# Altium PCB RS232转485通讯模块.PCBDOC
Units mm, origin at the board's own origin, x right, y up, seen from the top; angles counter-clockwise.
Board outline 172.85 x 123.82 mm, 2 copper layers (Top Layer, Bottom Layer); 18 components, 20 nets, 68 pads, 6 vias.
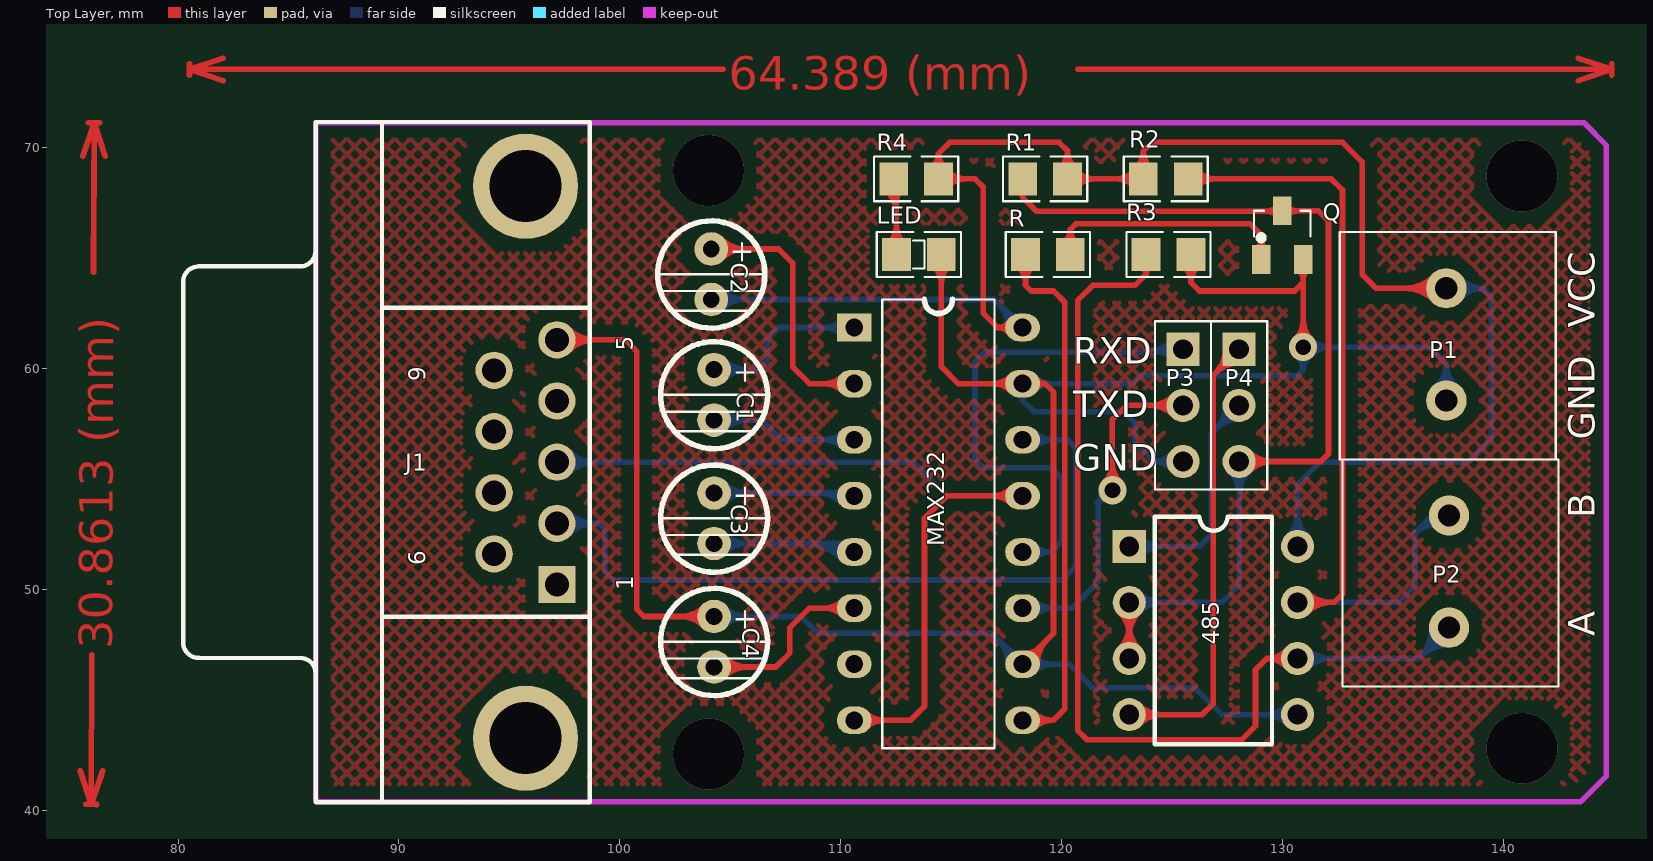
[diagram p0: Top Layer view]
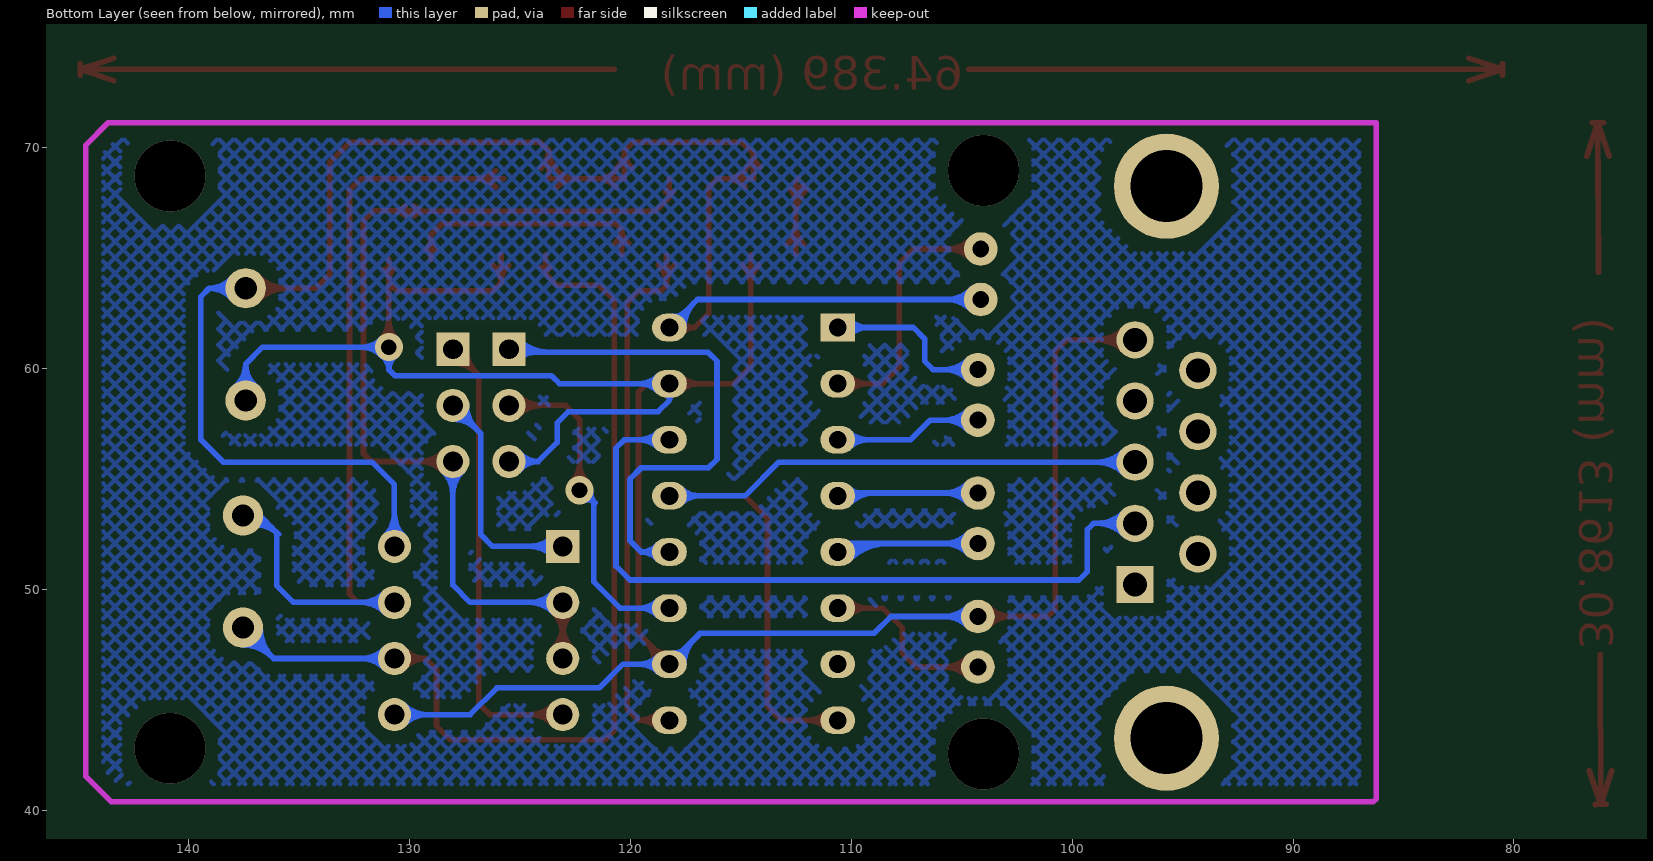
[diagram p1: Bottom Layer view, seen from below]

## Layer stack, top to bottom
Top Layer: signal copper 0.0356
Dielectric: dielectric 0.32, FR-4, Dk 4.8
Bottom Layer: signal copper 0.0356

## Board outline
36.322,110.363 36.322,3.937 208.534,3.937 208.534,127.762 36.068,127.762 36.068,108.966 35.687,108.966

## Design rules (kind name [scope] priority, off if disabled: settings)
Clearance [All] p1: gap=0.554
ComponentClearance [All] p1: gap=0.254 collisioncheckmode=0
PolygonConnect [All] p1: connectstyle=Relief reliefconductorwidth=0.254 reliefentries=4 polygonreliefangle="90 Angle"
RoutingVias [All] p1: holewidth=0.711 width=1.27 viastyle="Through Hole" minholewidth=0.711 minwidth=1.27 maxholewidth=0.711 maxwidth=1.27
SolderMaskExpansion [All] p1: expansion=0.102
TestPointUsage [All] p1: valid=0 allowmultiple=FALSE
Testpoint [All] p1: side=15 testpointundercomponent=TRUE minsize=1.016 maxsize=2.54 preferedsize=1.524 minholesize=0 maxholesize=1.016 preferedholesize=0.813 testpointgrid=0.025 style=1023 order=1234567890
Width [All] p1: maxlimit=0.254 minlimit=0.254 preferedwidth=0.254
17 further rules are at their usual default settings.

## Components (designator, comment, footprint, x,y, rotation, side; value= is the part's Value field where it differs from the comment)
485 "" DIP-8 126.873,48.133 r270 top
C1 "" C-DJ-4 101.727,57.531 r270 top
C2 "" C-DJ-4 101.6,62.992 r270 top
C3 "" C-DJ-4 101.727,51.943 r270 top
C4 "" C-DJ-4 101.727,46.355 r270 top
J1 "" DSUB1.385-2H9 86.233,55.753 r90 top
LED "" TP-0805-D 116.078,63.881 r0 top
MAX232 "" DIP16 110.617,61.849 r0 top
P1 "" JK128_2 138.557,63.119 r0 top
P2 "" JK128_2 138.684,52.832 r0 top
P3 "" HDR-3 124.333,54.61 r270 top
P4 "" HDR-3 126.873,54.61 r270 top
Q "" SO-G3 130.937,65.913 r0 top
R "" TP-0805-R 121.92,63.881 r0 top
R1 "" TP-0805-R 121.793,67.31 r0 top
R2 "" TP-0805-R 127.254,67.31 r0 top
R3 "" TP-0805-R 127.381,63.881 r0 top
R4 "" TP-0805-R 115.951,67.31 r0 top

## Footprints (in the part's own frame and the unit in brackets; to place one, negate y for a bottom-side part, rotate by r counter-clockwise, add the part's x,y. Pads: shape width x height; smd on the part's side, far side on the other; paste and mask are expansions set on the pad)
C-DJ-4 [mil] "电容4mm"
  round 60 hole 30: 1(-95,100) 2(-5,100)
  silkscreen extent -145,5 46,196
DIP16 [mil] "直插16管脚"
  rect 62x49.21 hole 32: 1(-0.15,-0.04)
  oval 62x49.21 hole 32: 2(-0.15,-100.04) 3(-0.15,-200.04) 4(-0.15,-300.04) 5(-0.15,-400.04) 6(-0.15,-500.04) 7(-0.15,-600.04) 8(-0.15,-700.04) 9(299.85,-700.04) 10(299.85,-600.04) 11(299.85,-500.04) 12(299.85,-400.04) 13(299.85,-300.04) 14(299.85,-200.04) 15(299.85,-100.04) 16(299.85,-0.04)
  silkscreen extent 50,-750 250,50
DIP-8 [mm] "DIP; 8 Leads; Row Spacing 7.62 mm; Pitch 2.54 mm"
  rect 1.5x1.5 hole 0.9: 1(-3.81,-3.81)
  round 1.5 hole 0.9: 2(-1.27,-3.81) 3(1.27,-3.81) 4(3.81,-3.81) 5(3.81,3.81) 6(1.27,3.81) 7(-1.27,3.81) 8(-3.81,3.81)
  silkscreen extent -5.15,-2.65 5.15,2.65
DSUB1.385-2H9 [mm] "Connector; D Subminiature; 9 Position; Right Angle; Pitch 1.385 mm"
  rect 1.69x1.69 hole 1.09: 1(-5.54,-10.92)
  round 1.69 hole 1.09: 2(-2.77,-10.92) 3(0,-10.92) 4(2.77,-10.92) 5(5.54,-10.92) 6(-4.155,-8.08) 7(-1.385,-8.08) 8(1.385,-8.08) 9(4.155,-8.08)
  round 4.76 hole 3.26: 10(-12.495,-9.5) 11(12.495,-9.5)
  silkscreen extent -15.4,-12.4 15.4,6
HDR-3 [mm] "3排针"
  rect 1.5x1.5 hole 0.9: 1(-6.253,1.165)
  round 1.5 hole 0.9: 2(-3.713,1.165) 3(-1.173,1.165)
  silkscreen extent -7.52,-0.11 0.1,2.43
JK128_2 [mil] "接线端子"
  round 71.81 hole 39.37: 1(-45,20) 2(-45,-180)
  silkscreen extent -235,-285 150,120
SO-G3 [mm] "贴片三极管"
  rect 0.85x1.3 smd: 1(-1.9,-0.983) 2(0,-0.983) 3(-0.95,1.217)
  silkscreen extent -2.23,-0.12 0.32,1.22
TP-0805-D [mm] "贴片二极管"
  rect 1.3x1.5 smd: 1(-3.556,1.27) 2(-1.524,1.27)
  silkscreen extent -4.44,0.25 -0.64,2.29
TP-0805-R [mm] "贴片0805"
  rect 1.3x1.5 smd: 1(-3.556,1.27) 2(-1.524,1.27)
  silkscreen extent -4.44,0.25 -0.64,2.29

## Part data
485: library part 485оƬ
C1 C2 C3 C4: library part "CAPACITOR POL", "Capacitor"
J1: library part "D Connector 9", "Receptacle Assembly, 9 Position, Right Angle"
LED: library part LED, "发光二极管"
MAX232: library part MAX232
P1 P2: library part PZ_2, "排针——2"
P3 P4: library part PZ_3, "排针——3"
Q: library part TPSJG_NPN, "贴片三极管——NPN"
R R1 R2 R3 R4: library part Res, "电阻"

## Via types
v1: diameter 3.2, hole 3.2, Top Layer to Bottom Layer, 4 vias
v2: diameter 1.27, hole 0.711, Top Layer to Bottom Layer, 2 vias

## Nets (pads, with @x,y where several pads share a name; then routed paths per layer and width w, separated by ;. In a path a pad name is that pad's centre, name@x,y a point inside that pad or via, vN(x,y) a via of type N, cw(c..) or ccw(c..) an arc to the next point about the centre after c; other vN are vias at no path point)
A: 485.6 P2.2 R3.1 | length 57.4
  Top Layer w0.254: R3.1@123.621,64.569 cw(c123.491,64.262) 123.825,64.262 ; R3.1 123.825,64.262 ; R3.1@124.029,64.569 ccw(c124.159,64.262) 123.825,64.262 ; 485.6@130.219,46.447 ccw(c129.286,45.608) 129.286,46.863 ; 485.6@130.219,47.279 cw(c129.286,48.118) 129.286,46.863 ; 485.6@130.408,46.616 ccw(c129.856,46.12) 129.856,46.863 ccw(c129.856,47.606) 485.6@130.408,47.11 ; 485.6 129.286,46.863 ; 123.825,64.262 123.317,63.754 121.412,63.754 120.726,63.068 120.726,43.612 121.158,43.18 128.143,43.18 128.778,43.815 128.778,46.355 129.286,46.863
  Bottom Layer w0.254: 485.6 136.144,46.863 P2.2 ; 485.6@130.944,46.602 cw(c131.574,45.972) 131.574,46.863 cw(c131.574,47.754) 485.6@130.944,47.124 ; 485.6@131.124,46.422 cw(c132.187,45.359) 132.187,46.863 cw(c132.187,48.367) 485.6@131.124,47.304 ; P2.2@136.756,48.26 cw(c134.861,48.26) 136.201,46.92 cw(c137.541,45.58) P2.2@137.541,47.475 ; P2.2@137.01,48.26 cw(c135.728,48.26) 136.635,47.354 cw(c137.541,46.447) P2.2@137.541,47.729
B: 485.7 P2.1 R2.2 | length 51.1
  Top Layer w0.254: R2.2 132.207,68.58 132.715,68.072 132.715,49.784 132.334,49.403 485.7 ; R2.2@126.1,68.21 cw(c126.993,67.317) 126.993,68.58 cw(c126.993,69.843) R2.2@126.1,68.95 ; 485.7@130.944,49.142 cw(c131.574,48.512) 131.574,49.403 cw(c131.574,50.294) 485.7@130.944,49.664 ; 485.7@131.124,48.962 cw(c132.187,47.899) 132.187,49.403 cw(c132.187,50.907) 485.7@131.124,49.844
  Bottom Layer w0.254: 485.7 135.255,49.403 136.017,50.165 136.017,52.578 136.779,53.34 P2.1 ; 485.7@130.944,49.142 cw(c131.574,48.512) 131.574,49.403 cw(c131.574,50.294) 485.7@130.944,49.664 ; 485.7@131.124,48.962 cw(c132.187,47.899) 132.187,49.403 cw(c132.187,50.907) 485.7@131.124,49.844 ; 135.928,52.489 cw(c136.934,51.484) P2.1@137.376,52.835 ; 136.221,52.782 cw(c137.078,51.925) P2.1@137.455,53.077 ; 136.513,53.074 cw(c137.222,52.365) P2.1@137.534,53.318
DI: 485.4 P4.1 | length 28.1
  Top Layer w0.254: 485.4 126.365,44.323 126.873,44.831 126.873,59.698 P4.1 ; 485.4@123.324,44.062 cw(c123.954,43.432) 123.954,44.323 cw(c123.954,45.214) 485.4@123.324,44.584 ; 485.4@123.504,43.882 cw(c124.567,42.819) 124.567,44.323 cw(c124.567,45.827) 485.4@123.504,44.764 ; P4.1@127.415,60.863 cw(c125.911,60.863) 126.974,59.799 cw(c128.038,58.736) P4.1@128.038,60.24 ; P4.1@127.669,60.863 cw(c126.778,60.863) 127.408,60.233 cw(c128.038,59.603) P4.1@128.038,60.494
GND: 485.5 C4.1 J1.5 LED.2 MAX232.10 MAX232.15 P1.2 P3.3 Q.2 R3.2 | length 161.2
  Top Layer w0.254: J1.5 100.251,61.293 100.762,60.782 100.762,49.098 101.092,48.768 C4.1 ; J1.5@97.481,60.965 cw(c98.273,60.173) 98.273,61.293 cw(c98.273,62.413) J1.5@97.481,61.621 ; J1.5@97.661,60.785 cw(c98.886,59.56) 98.886,61.293 cw(c98.886,63.026) J1.5@97.661,61.801 ; C4.1@103.818,48.319 ccw(c102.734,47.235) 102.734,48.768 ccw(c102.734,50.301) C4.1@103.818,49.217 ; C4.1@103.998,48.499 ccw(c103.347,47.848) 103.347,48.768 ccw(c103.347,49.688) C4.1@103.998,49.037 ; LED.2@114.184,64.681 cw(c113.291,63.788) 114.554,63.788 cw(c115.817,63.788) LED.2@114.924,64.681 ; LED.2 114.554,60.071 115.317,59.308 MAX232.15 119.254,59.308 ; MAX232.15@117.719,58.956 ccw(c116.869,58.106) 116.869,59.308 ccw(c116.869,60.51) MAX232.15@117.719,59.66 ; MAX232.10 118.236,46.608 119.634,48.006 119.634,58.928 119.254,59.308 ; MAX232.10@118.396,47.106 ccw(c118.396,47.923) 118.973,47.345 ; MAX232.10@118.64,46.608 cw(c119.614,46.608) 118.925,47.297 ; MAX232.15@118.828,59.061 cw(c119.254,58.817) 119.254,59.308 ; MAX232.15@118.828,59.555 ccw(c119.254,59.799) 119.254,59.308 ; MAX232.10@118.894,46.608 cw(c120.481,46.608) 119.359,47.731 ; R3.2@125.508,64.661 cw(c124.81,63.881) 125.857,63.881 ; R3.2 125.857,63.881 ; R3.2@126.206,64.661 ccw(c126.904,63.881) 125.857,63.881 ; v2@130.578,61.319 ccw(c129.711,62.186) 130.937,62.186 ; Q.2@130.726,64.494 cw(c130.217,63.986) 130.937,63.986 cw(c131.656,63.986) Q.2@131.148,64.494 ; v2(130.937,60.96) 130.937,61.722 ; 130.937,62.187 ccw(c132.164,62.187) v2@131.296,61.319 ; Q.2 130.937,63.881 ; 125.857,63.881 126.238,63.5 130.556,63.5 130.937,63.881 ; 130.937,61.722 cw(c130.62,61.722) 130.742,61.429 ccw(c130.62,61.722) 130.937,61.722 ; 130.937,61.722 ccw(c131.254,61.722) 131.132,61.429 cw(c131.254,61.722) 130.937,61.722 ; 130.937,61.722 130.937,63.881
  Bottom Layer w0.254: C4.1 108.204,48.768 108.966,48.006 116.835,48.006 MAX232.10 ; C4.1@104.536,48.499 cw(c105.187,47.848) 105.187,48.768 cw(c105.187,49.688) C4.1@104.536,49.037 ; C4.1@104.716,48.319 cw(c105.8,47.235) 105.8,48.768 cw(c105.8,50.301) C4.1@104.716,49.217 ; 117.106,47.735 cw(c115.978,46.608) MAX232.10@117.573,46.608 ; 117.498,47.343 ccw(c118.071,47.916) MAX232.10@118.071,47.106 ; 117.539,47.302 cw(c116.846,46.608) MAX232.10@117.827,46.608 ; MAX232.15@118.036,58.851 cw(c117.907,58.551) 118.233,58.551 ; MAX232.10@118.233,46.486 MAX232.10 ; MAX232.15@118.43,58.851 ccw(c118.56,58.551) 118.233,58.551 ; MAX232.10@118.748,46.256 cw(c119.598,45.406) 119.598,46.608 cw(c119.598,47.81) MAX232.10@118.748,46.96 ; MAX232.15@118.748,58.956 cw(c119.598,58.106) 119.598,59.308 cw(c119.598,60.51) MAX232.15@118.748,59.66 ; P3.3@125.018,55.386 ccw(c124.176,54.692) 124.176,55.783 ; P3.3@125.018,56.18 cw(c124.176,56.874) 124.176,55.783 ; P3.3@125.213,55.548 ccw(c124.715,55.137) 124.715,55.783 ccw(c124.715,56.429) P3.3@125.213,56.018 ; P3.3 124.176,55.783 ; 485.5@130.242,43.882 ccw(c129.179,42.819) 129.179,44.323 ccw(c129.179,45.827) 485.5@130.242,44.764 ; 485.5@130.422,44.062 ccw(c129.792,43.432) 129.792,44.323 ccw(c129.792,45.214) 485.5@130.422,44.584 ; v2@130.632,60.554 cw(c130.175,59.944) 130.937,59.944 ; 485.5 127.254,44.323 126.045,45.532 121.412,45.532 120.336,46.608 MAX232.10 ; v2@131.242,60.554 ccw(c131.699,59.944) 130.937,59.944 ; v2@131.296,60.601 cw(c132.163,59.734) 132.163,60.96 cw(c132.163,62.186) v2@131.296,61.319 ; P1.2@136.919,59.156 ccw(c136.07,60.198) 137.414,60.198 ; P1.2@137.079,58.959 ccw(c136.505,59.664) 137.414,59.664 ccw(c138.323,59.664) P1.2@137.749,58.959 ; P1.2 137.414,60.198 ; P1.2@137.909,59.156 cw(c138.758,60.198) 137.414,60.198 ; 118.233,58.551 118.745,58.039 122.809,58.039 123.317,57.531 123.317,56.642 124.176,55.783 ; 118.233,58.551 MAX232.15 123.214,59.308 123.571,59.665 130.658,59.665 130.937,59.944 ; 130.937,59.944 v2(130.937,60.96) 136.652,60.96 137.414,60.198
NetC1_1: C1.1 MAX232.1 | length 13.5
  Bottom Layer w0.254: C1.1 106.299,59.944 106.68,60.325 106.68,61.34 107.188,61.848 MAX232.1 ; C1.1@104.536,59.675 cw(c105.187,59.024) 105.187,59.944 cw(c105.187,60.864) C1.1@104.536,60.213 ; C1.1@104.716,59.495 cw(c105.8,58.411) 105.8,59.944 cw(c105.8,61.477) C1.1@104.716,60.393 ; MAX232.1@110.099,61.496 ccw(c109.249,60.646) 109.249,61.848 ccw(c109.249,63.05) MAX232.1@110.099,62.2
NetC1_2: C1.2 MAX232.3 | length 12.5
  Bottom Layer w0.254: C1.2 106.425,57.658 107.315,56.768 MAX232.3 ; C1.2@104.536,57.389 cw(c105.187,56.738) 105.187,57.658 cw(c105.187,58.578) C1.2@104.536,57.927 ; C1.2@104.716,57.209 cw(c105.8,56.125) 105.8,57.658 cw(c105.8,59.191) C1.2@104.716,58.107 ; MAX232.3@110.099,56.416 ccw(c109.249,55.566) 109.249,56.768 ccw(c109.249,57.97) MAX232.3@110.099,57.12
NetC2_1: C2.1 MAX232.2 | length 17.5
  Top Layer w0.254: C2.1 107.188,65.405 107.823,64.77 107.823,60.071 108.586,59.308 MAX232.2 ; C2.1@104.409,65.136 cw(c105.06,64.485) 105.06,65.405 cw(c105.06,66.325) C2.1@104.409,65.674 ; C2.1@104.589,64.956 cw(c105.673,63.872) 105.673,65.405 cw(c105.673,66.938) C2.1@104.589,65.854 ; MAX232.2@110.099,58.956 ccw(c109.249,58.106) 109.249,59.308 ccw(c109.249,60.51) MAX232.2@110.099,59.66
NetC3_1: C3.1 MAX232.4 | length 12.9
  Bottom Layer w0.254: C3.1 110.485,54.356 MAX232.4 ; C3.1@104.536,54.087 cw(c105.187,53.436) 105.187,54.356 cw(c105.187,55.276) C3.1@104.536,54.625 ; C3.1@104.716,53.907 cw(c105.8,52.823) 105.8,54.356 cw(c105.8,55.889) C3.1@104.716,54.805 ; 108.94,54.356 cw(c108.94,52.717) MAX232.4@110.099,53.876 ; 109.553,54.356 cw(c109.553,53.33) MAX232.4@110.278,54.055 ; 109.557,54.356 ccw(c109.557,55.121) MAX232.4@110.099,54.58
NetC3_2: C3.2 MAX232.5 | length 14.8
  Bottom Layer w0.254: C3.2 110.231,52.07 MAX232.5 ; C3.2@104.536,51.801 cw(c105.187,51.15) 105.187,52.07 cw(c105.187,52.99) C3.2@104.536,52.339 ; C3.2@104.716,51.621 cw(c105.8,50.537) 105.8,52.07 cw(c105.8,53.603) C3.2@104.716,52.519 ; 108.326,52.07 cw(c108.326,49.564) MAX232.5@110.099,51.336 ; 108.94,52.07 cw(c108.94,50.177) MAX232.5@110.278,51.515 ; 109.553,52.07 cw(c109.553,50.79) MAX232.5@110.458,51.695
NetC4_2: C4.2 MAX232.6 | length 13.9
  Top Layer w0.254: C4.2 107.061,46.482 107.696,47.117 107.696,48.26 108.584,49.148 MAX232.6 ; C4.2@104.536,46.213 cw(c105.187,45.562) 105.187,46.482 cw(c105.187,47.402) C4.2@104.536,46.751 ; C4.2@104.716,46.033 cw(c105.8,44.949) 105.8,46.482 cw(c105.8,48.015) C4.2@104.716,46.931 ; MAX232.6@110.099,48.796 ccw(c109.249,47.946) 109.249,49.148 ccw(c109.249,50.35) MAX232.6@110.099,49.5
NetLED_1: LED.1 R4.1 | length 8.3
  Top Layer w0.254: R4.1@112.025,68.11 cw(c110.826,66.911) 112.522,66.911 ; LED.1@112.152,65.621 ccw(c111.259,66.514) 112.522,66.514 ccw(c113.785,66.514) LED.1@112.892,65.621 ; R4.1@112.205,68.29 cw(c111.439,67.524) 112.522,67.524 cw(c113.351,67.524) R4.1@112.765,68.11 ; R4.1 112.522,68.453 LED.1
NetQ_1: Q.1 R.2 | length 13.8
  Top Layer w0.254: R.2@120.083,65.67 ccw(c119.618,66.294) 120.396,66.294 ; R.2 120.396,66.294 ; R.2@120.709,65.67 cw(c121.174,66.294) 120.396,66.294 ; Q.1@128.826,65.366 ccw(c128.317,65.875) 129.037,65.875 ccw(c129.756,65.875) Q.1@129.247,65.366 ; Q.1 129.037,66.035 128.524,66.548 120.65,66.548 120.396,66.294
R1IN: J1.3 MAX232.8 MAX232.13 | length 48.8
  Top Layer w0.254: MAX232.8@110.613,44.167 MAX232.8 113.156,44.068 113.792,44.704 113.792,53.213 114.807,54.228 MAX232.13 ; MAX232.8@111.128,43.716 cw(c111.978,42.866) 111.978,44.068 cw(c111.978,45.27) MAX232.8@111.128,44.42 ; MAX232.13@117.719,53.876 ccw(c116.869,53.026) 116.869,54.228 ccw(c116.869,55.43) MAX232.13@117.719,54.58
  Bottom Layer w0.254: J1.3 113.283,55.753 114.808,54.228 MAX232.13 ; J1.3@97.481,55.425 cw(c98.273,54.633) 98.273,55.753 cw(c98.273,56.873) J1.3@97.481,56.081 ; J1.3@97.661,55.245 cw(c98.886,54.02) 98.886,55.753 cw(c98.886,57.486) J1.3@97.661,56.261 ; MAX232.13@117.719,53.876 ccw(c116.869,53.026) 116.869,54.228 ccw(c116.869,55.43) MAX232.13@117.719,54.58
R2OUT: MAX232.9 R.1 | length 27.9
  Top Layer w0.254: R.1@117.994,64.681 cw(c117.101,63.788) 118.364,63.788 cw(c119.627,63.788) R.1@118.734,64.681 ; MAX232.9 119.633,44.068 120.142,44.577 120.142,62.992 119.634,63.5 118.618,63.5 118.364,63.754 R.1 ; MAX232.9@118.748,43.716 cw(c119.598,42.866) 119.598,44.068 cw(c119.598,45.27) MAX232.9@118.748,44.42
RDE: 485.2 485.3 P4.3 Q.3 R1.1 | length 65.8
  Top Layer w0.254: R1.1 118.237,67.742 ; 485.3@122.622,47.304 ccw(c121.559,48.367) 123.063,48.367 ccw(c124.567,48.367) 485.3@123.504,47.304 ; 485.2@122.622,48.962 cw(c121.559,47.899) 123.063,47.899 cw(c124.567,47.899) 485.2@123.504,48.962 ; 485.3@122.802,47.124 ccw(c122.172,47.754) 123.063,47.754 ccw(c123.954,47.754) 485.3@123.324,47.124 ; 485.2@122.802,49.142 cw(c122.172,48.512) 123.063,48.512 cw(c123.954,48.512) 485.2@123.324,49.142 ; 485.3 485.2 ; P4.3 131.729,55.783 132.08,56.134 132.08,66.675 131.625,67.13 Q.3 Q.3@129.987,67.107 ; P4.3@128.299,55.522 cw(c128.929,54.892) 128.929,55.783 cw(c128.929,56.674) P4.3@128.299,56.044 ; P4.3@128.479,55.342 cw(c129.542,54.279) 129.542,55.783 cw(c129.542,57.287) P4.3@128.479,56.224 ; 129.211,67.107 ccw(c129.211,67.906) Q.3@129.776,67.341 ; 129.324,67.107 cw(c129.324,66.467) Q.3@129.776,66.919 ; Q.3@129.987,67.005 Q.3@129.987,67.107 ; Q.3@130.198,66.919 cw(c130.706,66.411) 130.706,67.13 cw(c130.706,67.85) Q.3@130.198,67.341 ; 118.237,67.742 cw(c118.496,67.742) 118.41,67.987 ccw(c118.496,67.742) 118.237,67.742 ; 118.237,67.742 ccw(c117.978,67.742) 118.064,67.987 cw(c117.978,67.742) 118.237,67.742 ; 118.237,67.742 118.872,67.107 Q.3@129.987,67.107
  Bottom Layer w0.254: 485.2 127.254,49.403 128.038,50.187 P4.3 ; 485.2@123.324,49.142 cw(c123.954,48.512) 123.954,49.403 cw(c123.954,50.294) 485.2@123.324,49.664 ; 485.2@123.504,48.962 cw(c124.567,47.899) 124.567,49.403 cw(c124.567,50.907) 485.2@123.504,49.844 ; P4.3@127.597,55.342 cw(c126.534,54.279) 128.038,54.279 cw(c129.542,54.279) P4.3@128.479,55.342 ; P4.3@127.777,55.522 cw(c127.147,54.892) 128.038,54.892 cw(c128.929,54.892) P4.3@128.299,55.522
RO: 485.1 P4.2 | length 17.8
  Bottom Layer w0.254: 485.1 126.238,51.943 126.771,52.476 126.771,57.056 P4.2 ; 485.1@123.324,51.682 cw(c123.954,51.052) 123.954,51.943 cw(c123.954,52.834) 485.1@123.324,52.204 ; 485.1@123.504,51.502 cw(c124.567,50.439) 124.567,51.943 cw(c124.567,53.447) 485.1@123.504,52.384 ; P4.2@127.415,58.323 cw(c125.911,58.323) 126.974,57.259 cw(c128.038,56.196) P4.2@128.038,57.7 ; P4.2@127.669,58.323 cw(c126.778,58.323) 127.408,57.693 cw(c128.038,57.063) P4.2@128.038,57.954
RXD: MAX232.12 P3.1 | length 28.3
  Bottom Layer w0.254: MAX232.12 119.506,51.688 ; MAX232.12@118.767,51.357 cw(c119.506,50.699) 119.506,51.688 ; MAX232.12@118.767,52.019 ccw(c119.506,52.677) 119.506,51.688 ; 123.673,60.73 ccw(c123.673,62.688) P3.1@125.057,61.304 ; 124.287,60.73 ccw(c124.287,62.074) P3.1@125.237,61.124 ; 124.315,60.73 cw(c124.315,59.68) P3.1@125.057,60.422 ; P3.1 125.379,60.863 125.246,60.73 116.483,60.73 116.078,60.325 116.078,55.88 116.459,55.499 119.507,55.499 120.015,54.991 120.015,52.197 119.506,51.688
T1OUT: J1.2 MAX232.14 | length 40.2
  Bottom Layer w0.254: J1.2 99.036,52.983 99.314,52.705 99.314,50.8 99.695,50.419 120.015,50.419 120.65,51.054 120.65,56.388 120.27,56.768 MAX232.14 ; J1.2@97.481,52.655 cw(c98.273,51.863) 98.273,52.983 cw(c98.273,54.103) J1.2@97.481,53.311 ; J1.2@97.661,52.475 cw(c98.886,51.25) 98.886,52.983 cw(c98.886,54.716) J1.2@97.661,53.491 ; MAX232.14@118.748,56.416 cw(c119.598,55.566) 119.598,56.768 cw(c119.598,57.97) MAX232.14@118.748,57.12
TXD: MAX232.11 P3.2 | length 23.8
  Top Layer w0.254: v2@121.942,54.842 ccw(c121.075,55.709) 122.301,55.709 ccw(c123.527,55.709) v2@122.66,54.842 ; v2(122.301,54.483) 122.301,57.688 122.936,58.323 P3.2 ; P3.2@125.057,57.882 ccw(c123.994,56.819) 123.994,58.323 ccw(c123.994,59.827) P3.2@125.057,58.764 ; P3.2@125.237,58.062 ccw(c124.607,57.432) 124.607,58.323 ccw(c124.607,59.214) P3.2@125.237,58.584
  Bottom Layer w0.254: MAX232.11 120.471,49.148 121.666,50.343 121.666,53.975 122.174,54.483 v2(122.301,54.483) ; MAX232.11@118.748,48.796 cw(c119.598,47.946) 119.598,49.148 cw(c119.598,50.35) MAX232.11@118.748,49.5 ; v2@121.795,54.439 cw(c121.132,54.382) 121.603,53.912 cw(c121.932,53.582) v2@122.108,54.013
VCC: 485.8 C2.2 MAX232.16 P1.1 R1.2 R2.1 R4.2 | length 110.1
  Top Layer w0.254: R4.2@114.114,69.099 ccw(c113.649,69.723) 114.427,69.723 ; R4.2@114.74,69.099 cw(c115.205,69.723) 114.427,69.723 ; R4.2@114.797,68.21 cw(c115.69,67.317) 115.69,68.58 cw(c115.69,69.843) R4.2@114.797,68.95 ; MAX232.16@117.668,61.556 ccw(c117.095,61.141) 117.095,61.848 ; MAX232.16@117.668,62.14 cw(c117.095,62.555) 117.095,61.848 ; MAX232.16 117.095,61.848 ; R1.2@119.92,69.07 ccw(c119.222,69.85) 120.269,69.85 ; R1.2@120.618,69.07 cw(c121.316,69.85) 120.269,69.85 ; R1.2@120.639,68.21 cw(c121.532,67.317) 121.532,68.58 cw(c121.532,69.843) R1.2@120.639,68.95 ; R2.1@123.328,68.21 ccw(c122.435,67.317) 122.435,68.58 ccw(c122.435,69.843) R2.1@123.328,68.95 ; R2.1@123.349,69.07 ccw(c122.651,69.85) 123.698,69.85 ; R2.1@124.047,69.07 cw(c124.745,69.85) 123.698,69.85 ; P1.1@136.859,63.072 ccw(c135.519,61.732) 135.519,63.627 ccw(c135.519,65.522) P1.1@136.859,64.182 ; P1.1@137.039,63.252 ccw(c136.132,62.345) 136.132,63.627 ccw(c136.132,64.909) P1.1@137.039,64.002 ; P1.1 134.239,63.627 133.604,64.262 133.604,69.342 132.715,70.231 124.079,70.231 123.698,69.85 ; 114.427,69.723 114.935,70.231 119.888,70.231 120.269,69.85 ; 114.427,69.723 R4.2 116.078,68.58 116.459,68.199 116.459,62.484 117.095,61.848 ; 120.269,69.85 R1.2 R2.1 123.698,69.85
  Bottom Layer w0.254: C2.2 116.962,63.119 MAX232.16 ; C2.2@104.409,62.85 cw(c105.06,62.199) 105.06,63.119 cw(c105.06,64.039) C2.2@104.409,63.388 ; C2.2@104.589,62.67 cw(c105.673,61.586) 105.673,63.119 cw(c105.673,64.652) C2.2@104.589,63.568 ; 117.106,62.975 cw(c115.978,61.848) MAX232.16@117.573,61.848 ; 117.498,62.583 ccw(c118.071,63.156) MAX232.16@118.071,62.346 ; 117.539,62.542 cw(c116.846,61.848) MAX232.16@117.827,61.848 ; 485.8@130.242,52.384 ccw(c129.179,53.447) 130.683,53.447 ccw(c132.187,53.447) 485.8@131.124,52.384 ; 485.8@130.422,52.204 ccw(c129.792,52.834) 130.683,52.834 ccw(c131.574,52.834) 485.8@130.944,52.204 ; 485.8 130.683,54.737 131.699,55.753 138.43,55.753 139.446,56.769 139.446,63.246 139.065,63.627 ; P1.1 139.065,63.627 ; P1.1@137.826,63.292 cw(c138.531,62.718) 138.531,63.627 cw(c138.531,64.536) P1.1@137.826,63.962 ; P1.1@138.023,63.132 cw(c139.065,62.283) 139.065,63.627 ; P1.1@138.023,64.122 ccw(c139.065,64.971) 139.065,63.627
pads on no net: J1.1 J1.4 J1.6 J1.7 J1.8 J1.9 J1.10 J1.11 MAX232.7
copper on no net: | length 76.8
  Top Layer w0.254: 75.571,41.785 76.073,40.259 ; 75.686,69.598 76.2,71.12 ; 75.819,40.26 76.327,40.258 ; 75.946,71.121 76.454,71.119 ; 76.101,47.031 76.073,40.259 ; 76.172,64.348 76.2,71.12 ; 76.587,41.781 76.073,40.259 ; 76.702,69.594 76.2,71.12 ; 80.518,73.279 80.518,73.787 ; 82.042,73.025 80.518,73.533 ; 82.042,74.041 80.518,73.533 ; 104.689,73.533 80.518,73.533 ; 120.736,73.533 144.907,73.533 ; 143.383,73.025 144.907,73.533 ; 143.383,74.041 144.907,73.533 ; 144.907,73.279 144.907,73.787
  other v1: 104.013,42.545 140.843,42.799 140.843,68.707 104.013,68.961

## Polygon pours and split planes (outlines as drawn)
no net on Top Layer (hatched 45Degree grid 0.508 track 0.203): 86.487,70.866 86.487,40.64 143.383,40.64 144.272,41.529 144.272,70.104 143.637,70.739 86.36,70.739
no net on Bottom Layer (hatched 45Degree grid 0.508 track 0.203): 86.614,70.866 86.614,40.64 143.256,40.64 144.145,41.529 144.145,69.85 143.383,70.612 86.741,70.612 86.741,70.739

## Keep-outs
Keep-Out Layer:
  lines w0.25: 86.233,40.513 86.36,40.386 143.51,40.386 144.653,41.529 144.653,70.104 143.637,71.12 86.233,71.12 86.233,40.513

## Other copper
Top Layer:
  text "64.389 (mm)" at 104.943,72.619 h1.52
  text "30.8613 (mm)" at 77.016,47.281 h1.52 r89.76

## Silkscreen, mask and mechanical layers (free items; w line width, h text height)
Top Overlay:
  text "VCC" at 144.145,61.849 h1.2 r90
  text "RXD" at 120.523,60.198 h1.2
  text "TXD" at 120.523,57.785 h1.2
  text "GND" at 144.145,56.769 h1.2 r90
  text "GND" at 120.523,55.372 h1.2
  text "B" at 144.145,53.213 h1.2 r90
  text "A" at 144.145,47.879 h1.2 r90
Mechanical 1:
  lines w0.254: 86.233,40.386 86.233,71.12 143.637,71.12 144.653,70.104 144.653,41.402 143.637,40.386 143.002,40.386 86.233,40.386

## Text inside footprints (layer, text, board x,y; h text height)
J1: Top Overlay "1" at 100.608,49.963 h0.76 r90; Top Overlay "5" at 100.608,60.793 h0.76 r90; Top Overlay "9" at 91.208,59.408 h0.76 r90; Top Overlay "6" at 91.208,51.098 h0.76 r90